# Altium PCB main - 副本.PcbDoc
Units mil, origin at the board's own origin, x right, y up, seen from the top; angles counter-clockwise.
Board outline 6000 x 4000 mil, 2 copper layers (Top Layer, Bottom Layer); 34 components, 35 nets, 294 pads, 0 vias.
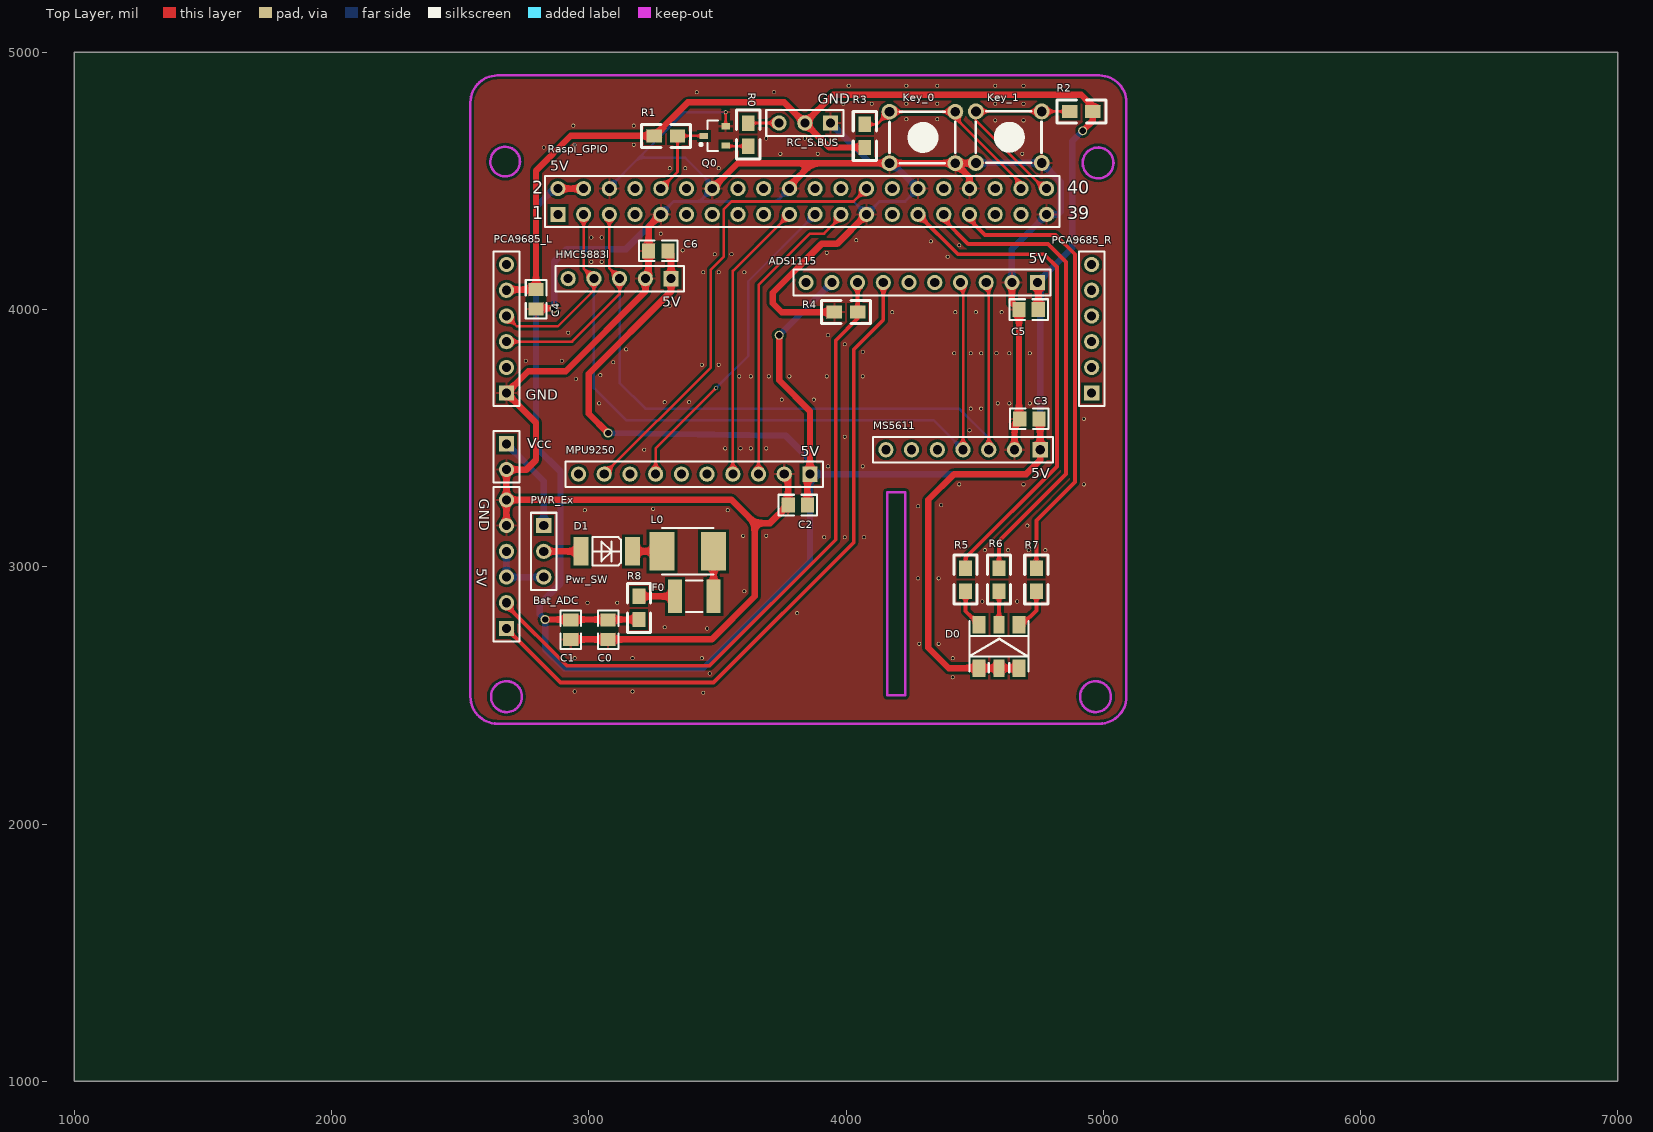
[diagram p0: Top Layer view]
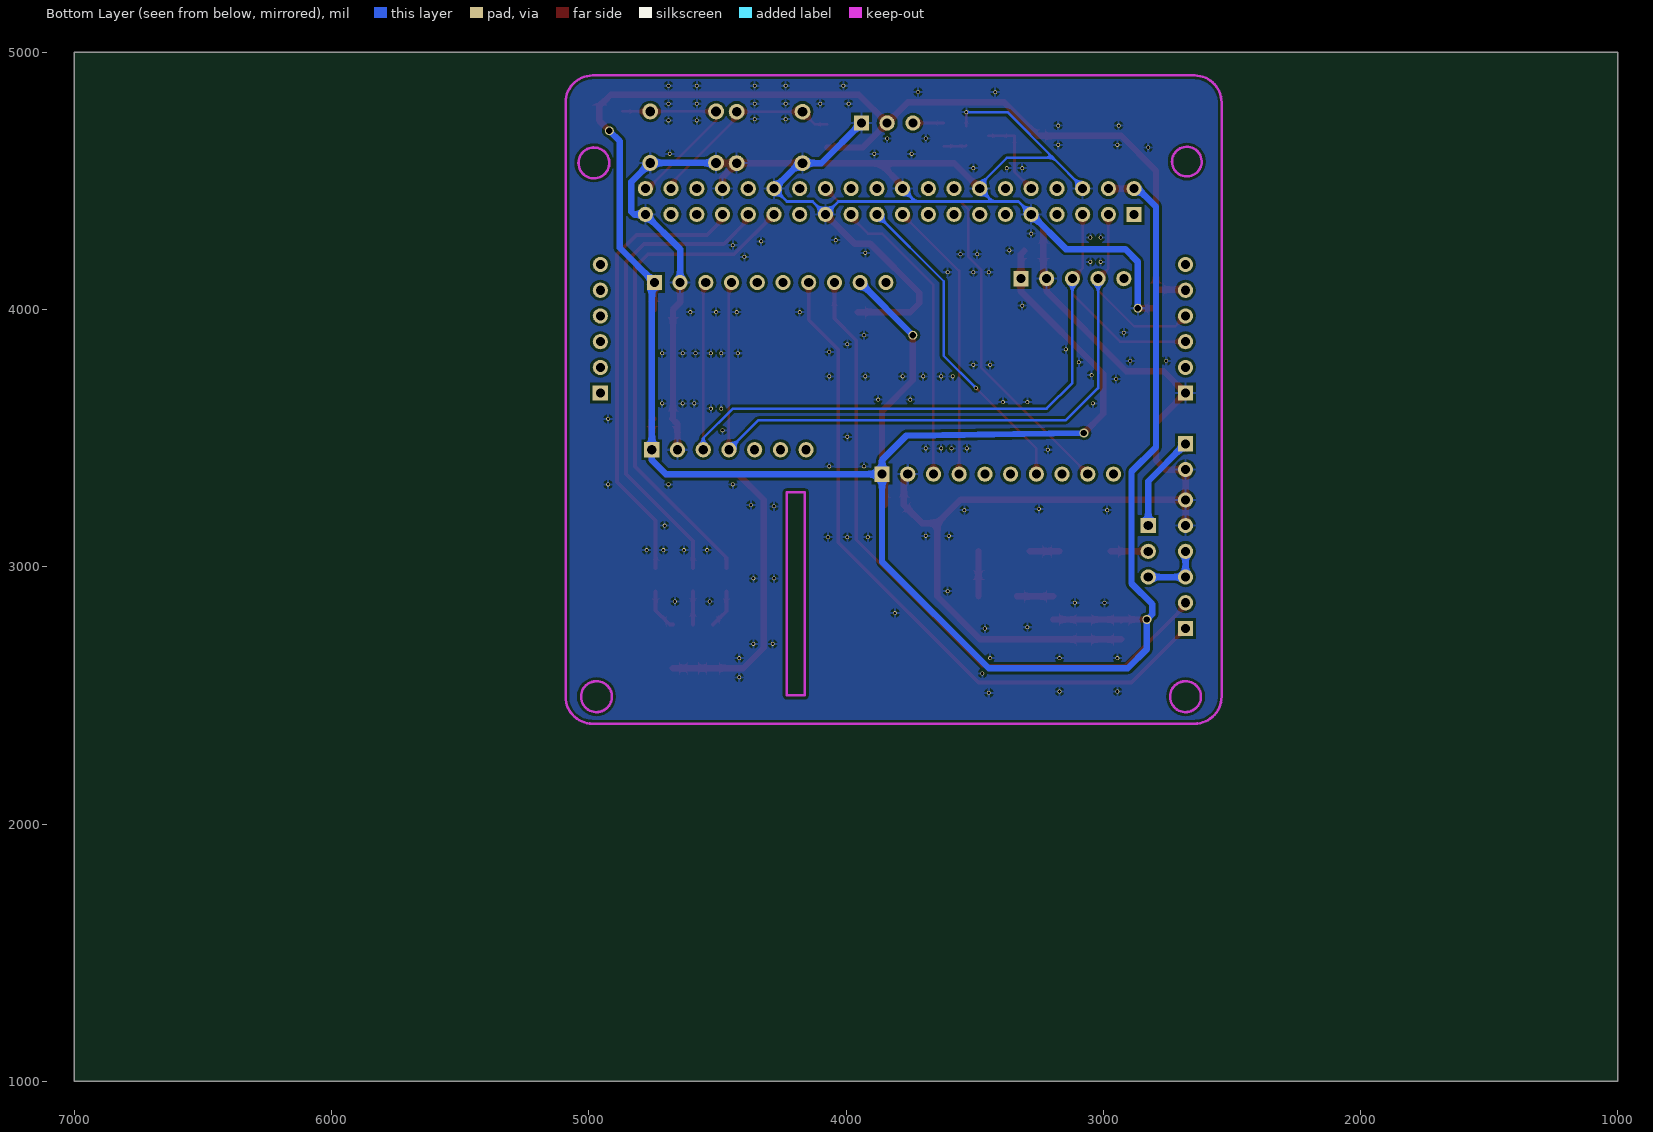
[diagram p1: Bottom Layer view, seen from below]

## Layer stack, top to bottom
Top Solder: solder mask 0.4, Solder Resist, Dk 3.5
Top Layer: signal copper 1.4
Dielectric 1: dielectric 12.6, FR-4, Dk 4.8
Bottom Layer: signal copper 1.4
Bottom Solder: solder mask 0.4, Solder Resist, Dk 3.5

## Board outline
1000,1000 7000,1000 7000,5000 1000,5000

## Design rules (kind name [scope] priority, off if disabled: settings)
Clearance [All] p1: gap=8
PolygonConnect [All] p1: connectstyle=Relief reliefconductorwidth=10 reliefentries=4 polygonreliefangle="90 Angle" airgapwidth=10
RoutingVias [All] p1: holewidth=28 width=50 viastyle="Through Hole" minholewidth=28 minwidth=50 maxholewidth=28 maxwidth=50
SolderMaskExpansion [All] p1: expansion=4
Width [All] p1: maxlimit=50 minlimit=10 preferedwidth=10
30 further rules are at their usual default settings.

## Classes and differential pairs
component class etc: Bat_ADC C0 C1 D1 F0 L0 PWR_Ex Pwr_SW R8
component class Sensors: ADS1115 C2 C3 C4 C5 C6 D0 HMC5883l Key_0 Key_1 MPU9250 MS5611 PCA9685_L PCA9685_R Q0 R0 R1 R2 R3 R4 R5 R6 R7 RC_S.BUS
component class Rpi_GPIO: Raspi_GPIO

## Components (designator, comment, footprint, x,y, rotation, side; value= is the part's Value field where it differs from the comment)
ADS1115 "第一轮先用于测试" HDR1X10 4745,4105.05 r180 top
Bat_ADC "最好是GH接头的，但是考虑到焊接难度，还是修改电压计的线" HDR1X6 2680,2760 r90 top
C0 "Cap" 0805-1 3075,2755 r90 top
C1 "Cap" 0805-1 2930,2755 r90 top
C2 "Cap" 0805-1 3812.6,3240 r0 top
C3 "Cap" 0805-1 4712.6,3575 r0 top
C4 "Cap" 0805-1 2795,4040 r90 top
C5 "Cap" 0805-1 4710,4000 r0 top
C6 "Cap" 0805-1 3270,4227.88 r0 top
D0 "LED-RGB" LED_5050_RGB 4605,2710.35 r90 top
D1 "4007" MELF 3070,3060 r0 top
F0 "3A，如果电供不上就直接短接" 1812 3410,2885.19 r180 top
HMC5883l "" HDR1X5 3320,4120 r180 top
Key_0 "" KEY_M 4169.09,4768.95 r0 top
Key_1 "" KEY_M 4505.01,4770 r0 top
L0 "Inductor" L-SMD-3 3385,3060 r0 top
MPU9250 "Header 10" HDR1X10 3860,3360 r180 top
MS5611 "" HDR1X7 4755,3455 r180 top
PCA9685_L "Header 6" HDR1X6 2680,3675 r90 top
PCA9685_R "Header 6" HDR1X6 4955,3675 r90 top
PWR_Ex "额外电源供电，最好使用接线端子" HDR1X2 2680,3477.88 r270 top
Pwr_SW "通过跳线帽选择从飞机电池供电还是额外供电" HDR1X3 2825,3160 r270 top
Q0 "9013" SOT23_L 3490,4675 r180 top
R0 "Res2" 0805 3619.94,4635 r90 top
R1 "Res2" 0805 3345,4675 r180 top
R2 "Res2" 0805 4870,4770 r0 top
R3 "Res2" 0805 4073.15,4720 r270 top
R4 "Res2" 0805 3955,3990 r0 top
R5 "Res2" 0805 4465.06,2995 r270 top
R6 "Res2" 0805 4595.06,2995 r270 top
R7 "Res2" 0805 4740,2995 r270 top
R8 "Res2" 0805 3194.94,2795 r90 top
Raspi_GPIO "Header 20X2" HDR2X20 2880,4370 r0 top
RC_S.BUS "Header 3" HDR1X3 3940,4725 r180 top

## Footprints (in the part's own frame and the unit in brackets; to place one, negate y for a bottom-side part, rotate by r counter-clockwise, add the part's x,y. Pads: shape width x height; smd on the part's side, far side on the other; paste and mask are expansions set on the pad)
0805 [mil]
  rect 60x50 smd: 1(0,-0.06) 2(90,-0.06)
  silkscreen extent -50,-45 140,45
0805-1 [mm] "0805带丝印"
  rect 1.3x1.5 smd: 1(-0.95,0) 2(0.95,0)
  silkscreen extent -1.91,-1.02 1.91,1.02, body extent -1,-0.62 1,0.63, height 0.5
1812 [mm] "Chip Capacitor, Body 4.5x3.2mm, IPC High Density"
  rect 1.4x3.3 smd: 1(-1.9,0) 2(1.9,0)
  silkscreen extent -0.8,-1.55 0.8,1.55, body extent -2.4,-1.7 2.4,1.7, height 1.4
HDR1X2 [mm] "Connector; Header; 2 Position"
  rect 1.5x1.5 hole 0.9: 1(0,0)
  round 1.5 hole 0.9: 2(2.54,0)
  silkscreen extent -1.27,-1.27 3.81,1.27
HDR1X3 [mm] "Connector; Header; 3 Position"
  rect 1.5x1.5 hole 0.9: 1(0,0)
  round 1.5 hole 0.9: 2(2.54,0) 3(5.08,0)
  silkscreen extent -1.27,-1.27 6.35,1.27
HDR1X5 [mm] "Connector; Header; 5 Position"
  rect 1.5x1.5 hole 0.9: 1(0,0)
  round 1.5 hole 0.9: 2(2.54,0) 3(5.08,0) 4(7.62,0) 5(10.16,0)
  silkscreen extent -1.27,-1.27 11.43,1.27
HDR1X6 [mm] "Connector; Header; 6 Position"
  rect 1.5x1.5 hole 0.9: 1(0,0)
  round 1.5 hole 0.9: 2(2.54,0) 3(5.08,0) 4(7.62,0) 5(10.16,0) 6(12.7,0)
  silkscreen extent -1.27,-1.27 13.97,1.27
HDR1X7 [mm] "Connector; Header; 7 Position"
  rect 1.5x1.5 hole 0.9: 1(0,0)
  round 1.5 hole 0.9: 2(2.54,0) 3(5.08,0) 4(7.62,0) 5(10.16,0) 6(12.7,0) 7(15.24,0)
  silkscreen extent -1.27,-1.27 16.51,1.27
HDR1X10 [mm] "Connector; Header; 10 Position"
  rect 1.5x1.5 hole 0.9: 1(0,0)
  round 1.5 hole 0.9: 2(2.54,0) 3(5.08,0) 4(7.62,0) 5(10.16,0) 6(12.7,0) 7(15.24,0) 8(17.78,0) 9(20.32,0) 10(22.86,0)
  silkscreen extent -1.27,-1.27 24.13,1.27
HDR2X20 [mm] "Connector; Header; 20x2 Position"
  rect 1.5x1.5 hole 0.9: 1(0,0)
  round 1.5 hole 0.9: 2(0,2.54) 3(2.54,0) 4(2.54,2.54) 5(5.08,0) 6(5.08,2.54) 7(7.62,0) 8(7.62,2.54) 9(10.16,0) 10(10.16,2.54) 11(12.7,0) 12(12.7,2.54) 13(15.24,0) 14(15.24,2.54) 15(17.78,0) 16(17.78,2.54) 17(20.32,0) 18(20.32,2.54) 19(22.86,0) 20(22.86,2.54) 21(25.4,0) 22(25.4,2.54) 23(27.94,0) 24(27.94,2.54) 25(30.48,0) 26(30.48,2.54) 27(33.02,0) 28(33.02,2.54) 29(35.56,0) 30(35.56,2.54) 31(38.1,0) 32(38.1,2.54) 33(40.64,0) 34(40.64,2.54) 35(43.18,0) 36(43.18,2.54) 37(45.72,0) 38(45.72,2.54) 39(48.26,0) 40(48.26,2.54)
  silkscreen extent -1.27,-1.27 49.53,3.81
KEY_M [mil]
  round 62 hole 38: 1(0,0) 1(255.91,0) 2(0,-200) 2(255.91,-200)
  silkscreen extent 0,-200 255,0
L-SMD-3 [mm] "贴片电感3.8"
  rect 2.5x3.8 smd: 1(-2.54,0) 2(2.54,0)
  silkscreen extent -2.54,-2.29 2.54,2.29, body extent -2.54,-1.91 2.54,1.91, height 4
LED_5050_RGB [mm]
  rect 1.7x1.25 smd: A(-2.658,-1.721) A(-2.658,2.229)
  rect 1.7x1.1 smd: A(-2.658,0.254) K2(1.642,0.254)
  rect 1.7x1.3 smd: K1(1.642,2.229) K3(1.642,-1.721)
  silkscreen extent -3.05,-2.67 1.99,3.17
MELF [mm] "贴片二极管"
  rect 1.5x2.8 smd: 1(-2.54,0) 2(2.54,0)
  silkscreen extent -1.4,-1.4 1.4,1.4
SOT23_L [mm] "SOT23, 3-Leads, Body 2.9x1.3mm, Pitch 0.95mm, Lead Span 2.3mm - Reverse Pinning, IPC High Density"
  rect 0.85x0.6 smd: 1(1.075,0) 2(-1.075,-0.95) 3(-1.075,0.95)
  silkscreen extent -0.3,-1.5 1.47,1.5, body extent -0.7,-1.5 0.7,1.5, height 1.1

## Part data
ADS1115: library part "Header 10", "Header, 10-Pin"
Bat_ADC: library part "Header 6", "Header, 6-Pin"
C0 C1 C2 C3 C4 C5 C6: "Capacitor"
D0: "三基色LED"
D1: library part "Diode 1N4004", "1 Amp General Purpose Rectifier"
F0: library part "Fuse 2", "Fuse"
HMC5883l: library part "Header 5", "Header, 5-Pin"
Key_0 Key_1: library part KEY_M
MPU9250: "Header, 10-Pin"
MS5611: library part "Header 7", "Header, 7-Pin"
PCA9685_L PCA9685_R: "Header, 6-Pin"
PWR_Ex: library part "Header 2", "Header, 2-Pin"
Pwr_SW: library part "Header 3", "Header, 3-Pin"
Q0: library part 2N3904, "NPN General Purpose Amplifier"
R0 R1 R2 R3 R4 R5 R6 R7 R8: "Resistor"
Raspi_GPIO: "Header, 20-Pin, Dual row"
RC_S.BUS: "Header, 3-Pin"

## Free pads (board coordinates)
  round 15 hole 10: 4(2755,3800) 4(2825,4630) 4(2895,3800) 4(2940,4715) 4(2945,2515) 4(2945,2645) 4(2945,4640) 4(2950,3730) 4(2985,3220) 4(2995,2860) 4(3010,4185) 4(3010,4280) 4(3040,3635) 4(3045,3745) 4(3050,4185) 4(3050,4280) 4(3095,3795) 4(3145,3845) 4(3170,2515) 4(3170,2645) 4(3175,4640) 4(3175,4715) 4(3215,3455) 4(3250,3225) 4(3280,4295) 4(3295,2765) 4(3295,3640) 4(3315,4015) 4(3315,4550) 4(3365,4230) 4(3375,4550) 4(3390,3640) 4(3420,4845) 4(3440,2645) 4(3440,3785) 4(3445,2510) 4(3445,4145) 4(3460,2760) 4(3470,2585) 4(3490,4215) 4(3495,3695) 4(3505,3785) 4(3505,4145) 4(3505,4550) 4(3530,3460) 4(3532.32,4767.32) 4(3540,3220) 4(3555,4215) 4(3585,3740) 4(3590,3460) 4(3600,3120) 4(3605,2905) 4(3605,4145) 4(3630,3460) 4(3630,3740) 4(3690,3120) 4(3690,3460) 4(3690,4665) 4(3700,3740) 4(3720,4845) 4(3745,4605) 4(3750,3650) 4(3780,3740) 4(3810,2820) 4(3840,4665) 4(3875,3650) 4(3890,4605) 4(3915,3115) 4(3925,3740) 4(3925,4220) 4(3930,3390) 4(3930,3900) 4(3990,4800) 4(3995,3115) 4(3995,3505) 4(3995,3865) 4(4010,4870) 4(4040,4270) 4(4065,3390) 4(4065,3740) 4(4065,3835) 4(4070,3115) 4(4100,4800) 4(4180,3990) 4(4235,4740) 4(4235,4800) 4(4235,4870) 4(4280,2955) 4(4280,3235) 4(4285,2700) 4(4330,4265) 4(4355,4740) 4(4355,4800) 4(4355,4870) 4(4360,2700) 4(4360,2955) 4(4370,3240) 4(4395,4205) 4(4415,2570) 4(4415,2645) 4(4420,3830) 4(4425,3990) 4(4440,3320) 4(4440,4250) 4(4480,3530) 4(4485,3615) 4(4485,3830) 4(4505,3990) 4(4525,3615) 4(4525,3830) 4(4530,2865) 4(4540,3065) 4(4580,4735) 4(4580,4800) 4(4580,4870) 4(4585,3830) 4(4590,3635) 4(4605,3990) 4(4630,3065) 4(4635,3635) 4(4635,3830) 4(4665,2865) 4(4685,4605) 4(4690,3320) 4(4690,4735) 4(4690,4800) 4(4690,4870) 4(4705,3160) 4(4710,3065) 4(4715,3635) 4(4715,3830) 4(4775,3065) 4(4925,3320) 4(4925,3575)
  round 15 hole 10 paste+0: 4(2920,3910)
  round 15 hole 10 mask+4: 4(3110,2860)
  round 35 hole 25: 5(2830,2795) 5(2865,4005) 5(3075,3520) 5(3740,3900.05) 5(4920,4695)

## Nets (pads, with @x,y where several pads share a name; then routed paths per layer and width w, separated by ;. In a path a pad name is that pad's centre, name@x,y a point inside that pad or via, vN(x,y) a via of type N, cw(c..) or ccw(c..) an arc to the next point about the centre after c; other vN are vias at no path point)
3V3: Raspi_GPIO.1
BACKUP_1: Raspi_GPIO.11
BACKUP_2: Raspi_GPIO.13
CUR_5: ADS1115.8 Bat_ADC.2 R4.2 | length 2625.6
  Top Layer w15: Bat_ADC.2 2680,2850 2915,2615 3470,2615 3960,3105 3960,3880 4045,3965 R4.2 ADS1115.8
GND: ADS1115.2 Bat_ADC.5 Bat_ADC.6 C0.1 C1.1 C2.1 C3.1 C4.1 C5.1 C6.1 HMC5883l.2 Key_0.2 Key_1.2 MPU9250.2 MS5611.2 pad.4@2755,3800 pad.4@2825,4630 pad.4@2895,3800 pad.4@2920,3910 pad.4@2940,4715 pad.4@2945,2515 pad.4@2945,2645 pad.4@2945,4640 pad.4@2950,3730 pad.4@2985,3220 pad.4@2995,2860 pad.4@3010,4185 pad.4@3010,4280 pad.4@3040,3635 pad.4@3045,3745 pad.4@3050,4185 pad.4@3050,4280 pad.4@3095,3795 pad.4@3110,2860 pad.4@3145,3845 pad.4@3170,2515 pad.4@3170,2645 pad.4@3175,4640 pad.4@3175,4715 pad.4@3215,3455 pad.4@3250,3225 pad.4@3280,4295 pad.4@3295,2765 pad.4@3295,3640 pad.4@3315,4015 pad.4@3315,4550 pad.4@3365,4230 pad.4@3375,4550 pad.4@3390,3640 pad.4@3420,4845 pad.4@3440,2645 pad.4@3440,3785 pad.4@3445,2510 pad.4@3445,4145 pad.4@3460,2760 pad.4@3470,2585 pad.4@3490,4215 pad.4@3505,3785 pad.4@3505,4145 pad.4@3505,4550 pad.4@3530,3460 pad.4@3532.32,4767.32 pad.4@3540,3220 pad.4@3555,4215 pad.4@3585,3740 pad.4@3590,3460 pad.4@3600,3120 pad.4@3605,2905 pad.4@3605,4145 pad.4@3630,3460 pad.4@3630,3740 pad.4@3690,3120 pad.4@3690,3460 pad.4@3690,4665 pad.4@3700,3740 pad.4@3720,4845 pad.4@3745,4605 pad.4@3750,3650 pad.4@3780,3740 pad.4@3810,2820 pad.4@3840,4665 pad.4@3875,3650 pad.4@3890,4605 pad.4@3915,3115 pad.4@3925,3740 pad.4@3925,4220 pad.4@3930,3390 pad.4@3930,3900 pad.4@3990,4800 pad.4@3995,3115 pad.4@3995,3505 pad.4@3995,3865 pad.4@4010,4870 pad.4@4040,4270 pad.4@4065,3390 pad.4@4065,3740 pad.4@4065,3835 pad.4@4070,3115 pad.4@4100,4800 pad.4@4180,3990 pad.4@4235,4740 pad.4@4235,4800 pad.4@4235,4870 pad.4@4280,2955 pad.4@4280,3235 pad.4@4285,2700 pad.4@4330,4265 pad.4@4355,4740 pad.4@4355,4800 pad.4@4355,4870 pad.4@4360,2700 pad.4@4360,2955 pad.4@4370,3240 pad.4@4395,4205 pad.4@4415,2570 pad.4@4415,2645 pad.4@4420,3830 pad.4@4425,3990 pad.4@4440,3320 pad.4@4440,4250 pad.4@4480,3530 pad.4@4485,3615 pad.4@4485,3830 pad.4@4505,3990 pad.4@4525,3615 pad.4@4525,3830 pad.4@4530,2865 pad.4@4540,3065 pad.4@4580,4735 pad.4@4580,4800 pad.4@4580,4870 pad.4@4585,3830 pad.4@4590,3635 pad.4@4605,3990 pad.4@4630,3065 pad.4@4635,3635 pad.4@4635,3830 pad.4@4665,2865 pad.4@4685,4605 pad.4@4690,3320 pad.4@4690,4735 pad.4@4690,4800 pad.4@4690,4870 pad.4@4705,3160 pad.4@4710,3065 pad.4@4715,3635 pad.4@4715,3830 pad.4@4775,3065 pad.4@4925,3320 pad.4@4925,3575 pad.5@2865,4005 PCA9685_L.1 PWR_Ex.2 Q0.2 R4.1 Raspi_GPIO.6 Raspi_GPIO.9 Raspi_GPIO.14 Raspi_GPIO.20 Raspi_GPIO.25 Raspi_GPIO.30 Raspi_GPIO.34 Raspi_GPIO.39 RC_S.BUS.1 | length 11067.7
  Top Layer w10: Q0.2 pad.4@3532.32,4767.32
  Top Layer w25: Bat_ADC.5 Bat_ADC.6 ; C4.1 2797.4,4005 pad.5@2865,4005 ; C1.1 C0.1 3477.6,2717.6 3645,2885 3645,3170 ; Raspi_GPIO.9 3232.6,4322.6 C6.1 3232.6,4132.6 HMC5883l.2 3220,4070 2910,3760 2765,3760 PCA9685_L.1 2795,3560 2795,3415 2757.88,3377.88 PWR_Ex.2 Bat_ADC.6 ; Raspi_GPIO.14 3578.95,4568.95 3868.95,4568.95 ; MPU9250.2 3775,3345 3775,3240.2 3704.8,3170 3645,3170 ; Raspi_GPIO.20 3780,4480 3868.95,4568.95 ; R4.1 3750.06,3989.94 3715,4025 3715,4065 3905,4255 3965,4255 Raspi_GPIO.25 ; Raspi_GPIO.34 4480,4513.95 Key_0.2@4425,4568.95 ; Key_1.2@4505.01,4570 4503.96,4568.95 Key_0.2@4425,4568.95 ; ADS1115.2 4645,4027.6 C5.1 4672.6,3577.6 C3.1 4655,3554.8 MS5611.2 ; Bat_ADC.6 3555,3260 3645,3170 ; 3868.95,4568.95 4169.09,4568.95 Key_0.2@4425,4568.95
  Bottom Layer w10: Raspi_GPIO.6 3080,4475 3195,4590 ; Raspi_GPIO.9 3330,4420 3430,4420 ; pad.4@3532.32,4767.32 3372.32,4767.32 3195,4590 ; Raspi_GPIO.20 3730,4420 ; Raspi_GPIO.30 4230,4420 4130,4420 Raspi_GPIO.25 4030,4420 3730,4420 ; 3195,4590 3375,4590 3480,4485 Raspi_GPIO.14 3430,4420 ; 3430,4420 3730,4420
  Bottom Layer w25: pad.5@2865,4005 2865,4185 2915,4235 3145,4235 Raspi_GPIO.9 ; RC_S.BUS.1 4096.05,4568.95 4169.09,4568.95 4181.05,4568.95 Raspi_GPIO.30 ; Key_1.2@4505.01,4570 4760.92,4570 4835,4495.92 4835,4380 4825,4370 Raspi_GPIO.39 4645,4235 ADS1115.2
I2C_SCL: ADS1115.3 HMC5883l.3 MS5611.3 PCA9685_L.3 Raspi_GPIO.5 | length 3471.5
  Top Layer w10: PCA9685_L.3 2935,3875 3120,4060 HMC5883l.3 3080,4160 Raspi_GPIO.5 ; ADS1115.3 4555,4095.05 MS5611.3
  Bottom Layer w10: HMC5883l.3 3120,3715 3220,3615 4440,3615 4555,3500 MS5611.3
I2C_SDA: ADS1115.4 HMC5883l.4 MS5611.4 PCA9685_L.4 Raspi_GPIO.3 | length 3339.7
  Top Layer w10: PCA9685_L.4 2720,3935 2880,3935 3020,4075 HMC5883l.4 2980,4160 Raspi_GPIO.3 ; ADS1115.4 4455,4095.05 MS5611.4
  Bottom Layer w10: HMC5883l.4 3020,3695 3145,3570 4340,3570 MS5611.4
KEY_0: Key_0.1 R3.1 Raspi_GPIO.38 | length 776.8
  Top Layer w10: R3.1 4120.15,4720 4169.09,4768.95 4425,4768.95 4425,4745 4680,4490 Raspi_GPIO.38
KEY_1: Key_1.1 R2.1 Raspi_GPIO.40 | length 784.8
  Top Layer w10: Raspi_GPIO.40 4770,4470 4505.01,4734.99 4505.01,4770 4760.92,4770 R2.1@4870,4770
LED_B: R5.1 Raspi_GPIO.29 | length 1942
  Top Layer w15: Raspi_GPIO.29 4435,4215 4770,4215 4820,4165 4820,3390 4465,3035 R5.1
LED_G: R7.1 Raspi_GPIO.33 | length 1768.1
  Top Layer w15: Raspi_GPIO.33 4480,4350 4540,4290 4815,4290 4890,4215 4890,3330 4739.94,3179.94 R7.1
LED_R: R6.1 Raspi_GPIO.31 | length 1861
  Top Layer w15: Raspi_GPIO.31 4380,4350 4475,4255 4785,4255 4855,4185 4855,3360 4595,3100 R6.1
MPU9250_CS: MPU9250.9 Raspi_GPIO.26 | length 1811.2
  Top Layer w10: MPU9250.9 3475,3775 3475,4155 3524.53,4204.53 3524.53,4388.44 3523.99,4388.99 3555,4420 4030,4420 Raspi_GPIO.26
MPU9250_INT: Raspi_GPIO.16
NetD0_1: D0.K1 R5.2 | length 151.6
  Top Layer w15: R5.2 4465,2827.24 D0.K1
NetD0_3: D0.K2 R6.2 | length 130
  Top Layer w15: D0.K2 R6.2
NetD0_4: D0.K3 R7.2 | length 165
  Top Layer w15: D0.K3 4685,2775 4739.94,2829.94 R7.2
NetD1_1: D1.1 Pwr_SW.2 | length 145
  Top Layer w25: Pwr_SW.2 D1.1
NetD1_2: D1.2 L0.1 | length 115
  Top Layer w25: D1.2 L0.1
NetF0_1: F0.1 L0.2 | length 174.9
  Top Layer w25: F0.1 3485,2885.38 L0.2
NetF0_2: F0.2 R8.2 | length 140.3
  Top Layer w25: R8.2 3195.19,2885.19 F0.2
NetQ0_2: Q0.3 R0.1 | length 88.8
  Top Layer w10: Q0.3 3534.92,4635 R0.1
PPM_DECODE: Raspi_GPIO.7
RPI_PWM: Raspi_GPIO.12
SBUS_IN: R0.2 RC_S.BUS.3 | length 120
  Top Layer w10: R0.2 RC_S.BUS.3
SCLK_9250: MPU9250.3 Raspi_GPIO.23 | length 1194.8
  Top Layer w10: MPU9250.3 3660,4095 3860,4295 3915,4295 3980,4360 Raspi_GPIO.23 Raspi_GPIO.23@3960,4370
SDI_9250: MPU9250.4 Raspi_GPIO.19 | length 1101.1
  Top Layer w10: MPU9250.4 3560,4150 Raspi_GPIO.19
SDO_9250: MPU9250.7 pad.4@3495,3695 Raspi_GPIO.21 | length 1266.8
  Top Layer w10: MPU9250.7 3260,3460 pad.4@3495,3695
  Bottom Layer w10: pad.4@3495,3695 3620,3820 3620,4110 Raspi_GPIO.21
UBLOX_CS: Raspi_GPIO.24
USART_RX: Q0.1 R1.1 Raspi_GPIO.10 | length 334.7
  Top Layer w10: Raspi_GPIO.10 3345,4535 R1.1 3345.06,4675 Q0.1
USART_TX: Raspi_GPIO.8
V_BATEX: PWR_Ex.1 Pwr_SW.1 | length 377.9
  Bottom Layer w25: PWR_Ex.1 2825,3332.88 Pwr_SW.1
V_UBEC: Bat_ADC.3 Bat_ADC.4 Pwr_SW.3 | length 245
  Bottom Layer w25: Bat_ADC.4 Bat_ADC.3 Pwr_SW.3
VCC: ADS1115.1 ADS1115.9 C0.2 C1.2 C2.2 C3.2 C4.2 C5.2 C6.2 D0.A HMC5883l.1 MPU9250.1 MS5611.1 pad.5@2830,2795 pad.5@3075,3520 pad.5@3740,3900.05 pad.5@4920,4695 PCA9685_L.5 R1.2 R2.2 R3.2 R8.1 Raspi_GPIO.2 Raspi_GPIO.4 RC_S.BUS.2 | length 14051.9
  Top Layer w25: PCA9685_L.5 2682.4,4077.4 C4.2 2795,4540 2930.06,4675.06 R1.2 3384.94,4805 3760,4805 RC_S.BUS.2 ; pad.5@2830,2795 2927.4,2795 C1.2 2932.6,2795 R8.1 ; Raspi_GPIO.2 Raspi_GPIO.4 ; pad.5@3075,3520 3000,3595 3000,3750 3320,4070 HMC5883l.1 3320,4215.29 C6.2 ; pad.5@3740,3900.05 3740,3725 3860,3605 MPU9250.1 3850,3350 C2.2 ; R3.2 3935,4630 RC_S.BUS.2 ; D0.A@4672.76,2605.71 4595,2605.71 4517.24,2605.71 4399.29,2605.71 4320,2685 4320,3260 4420,3360 4700,3360 4755,3415 MS5611.1 4755,3570 C3.2 ; ADS1115.1 4747.4,4102.65 C5.2 ; pad.5@4920,4695 4960,4735 R2.2 4960,4790 4915,4835 3950,4835 RC_S.BUS.2
  Bottom Layer w25: Raspi_GPIO.2 2865,4470 2795,4400 2795,3465 2890,3370 2890,2935 2810,2855 2810,2815 2830,2795 2830,2680 2905,2605 3445,2605 3860,3020 MPU9250.1 ; pad.5@3075,3520 3765,3510 3860,3415 MPU9250.1 ; pad.5@3740,3900.05 ADS1115.9 ; pad.5@4920,4695 4880,4655 4880,4240.05 ADS1115.1 4755,4095.05 MS5611.1 4755,3415 4700,3360 MPU9250.1
VOL_5: ADS1115.7 Bat_ADC.1 | length 2720.4
  Top Layer w15: Bat_ADC.1 2890,2550 3485,2550 4030,3095 4030,3845 4145,3960 ADS1115.7
pads on no net: ADS1115.5 ADS1115.6 ADS1115.10 HMC5883l.5 MPU9250.5 MPU9250.6 MPU9250.8 MPU9250.10 MS5611.5 MS5611.6 MS5611.7 PCA9685_L.2 PCA9685_L.6 PCA9685_R.1 PCA9685_R.2 PCA9685_R.3 PCA9685_R.4 PCA9685_R.5 PCA9685_R.6 Raspi_GPIO.15 Raspi_GPIO.17 Raspi_GPIO.18 Raspi_GPIO.22 Raspi_GPIO.27 Raspi_GPIO.28 Raspi_GPIO.32 Raspi_GPIO.35 Raspi_GPIO.36 Raspi_GPIO.37

## Polygon pours and split planes (outlines as drawn)
GND on Top Layer "Mechanical 1-No Net" (solid, pour order 0): 2540,4910 5090,4910 5090,2395 5090,2390 2540,2390 2540,4910
GND on Bottom Layer "Mechanical 1-No Net" (solid, pour order 8): 2540,4910 2540,2390 5090,2390 5090,4910 2540,4910

## Keep-outs
Keep-Out Layer:
  circle w10: c4980,4570 r60
  circle w10: c2680,2495 r60
  circle w10: c4970,2495 r60
  lines w10: 2732.44,4579.42 ccw(c2675,4575) 2732.61,4574.92 ; 2540,2495 ccw(c2645,2495) 2645,2390 4985,2390 ccw(c4985,2495) 5090,2495 5090,3680 5090,4805 ccw(c4985,4805) 4985,4910 2645,4910 ccw(c2645,4805) 2540,4805 2540,2495 ; 4160,2500 4230,2500 4230,3290 4160,3290 4160,2500

## Silkscreen, mask and mechanical layers (free items; w line width, h text height)
Top Overlay:
  text "GND" at 3890,4800 h40
  text "5V" at 2850,4540 h40
  text "5V" at 4710,4180 h40
  text "5V" at 3285,4010 h40
  text "GND" at 2755,3650 h40
  text "Vcc" at 2760,3460 h40
  text "5V" at 3825,3430 h40
  text "5V" at 4720,3345 h40
  text "GND" at 2575,3265 h40 r270
  text "5V" at 2565,2995 h40 r270

## Text inside footprints (layer, text, board x,y; h text height)
Raspi_GPIO: Top Overlay "39" at 4860,4350 h50; Top Overlay "40" at 4860,4450 h50; Top Overlay "2" at 2780,4450 h50; Top Overlay "1" at 2780,4350 h50